# EAGLE board Arduino_MEGA_2560-Rev3 (EAGLE 7.7.0)

Size 100 x 80 mm. Coordinates in mm from the lower left corner, seen from the top.
Outline: 100,0 0,0 0,80 100,80 100,0
Copper layers (1*16): Top 0.035mm / dielectric 1.5mm / Bottom 0.035mm
Design rules "default": minimum track width 8mil, minimum drill 16mil, track to track 7mil, track to pad 7mil, pad to pad 8mil, via to via 10mil, smd to smd 7mil, copper to edge 27mil, drill to drill 12mil, minimum pad ring 10mil, minimum via ring 10mil, stop-mask expansion 2mil, vias tented up to drill 24mil, thermal gap 10mil
Net classes: 0 default: width 0.203 mm, drill 0.406 mm, clearance 0.203 mm; 1 power: width 0.61 mm, drill 0.406 mm, clearance 0.203 mm; 2 gnd: width 0.305 mm, drill 0.406 mm, clearance 0.203 mm; 3 power usb: width 0.508 mm, drill 0.406 mm, clearance 0.203 mm
Holes 3.2 mm at 96.52,2.54 15.24,50.8 90.17,50.8 13.97,2.54 66.04,35.56 66.04,7.62

## Footprints (pad centres in the part's own frame; a part is rotated, then mirrored left to right if it is on the bottom)
C0603-ROUND = smd 0.898 x 1.1: 1 -0.889,0; 2 0.889,0
0603-CAP = smd 1.1 x 1: 1 -0.85,0; 2 0.85,0
1X08 = drill 0.85 pad 1.422 long: 1 -8.89,0; 2 -6.35,0; 3 -3.81,0; 4 -1.27,0; 5 1.27,0; 6 3.81,0; 7 6.35,0; 8 8.89,0
SMB = smd 2.4 x 2.4: A 2.2,0; C -2.2,0
MINIMELF = smd 1.4 x 1.8: A 1.7,0; C -1.7,0
FIDUCIA-MOUNT = smd 1.016 x 1.016: P$1 0,0
SOT223 = smd 1.219 x 2.235: 1 -2.311,-3.099; 2 0,-3.099; 3 2.311,-3.099 | smd 3.6 x 2.2: 4 0,3.099
TQFP100 = smd 1.5 x 0.3: 1 -8,6; 2 -8,5.5; 3 -8,5; 4 -8,4.5; 5 -8,4; 6 -8,3.5; 7 -8,3; 8 -8,2.5; 9 -8,2; 10 -8,1.5; 11 -8,1; 12 -8,0.5; 13 -8,0; 14 -8,-0.5; 15 -8,-1; 16 -8,-1.5; 17 -8,-2; 18 -8,-2.5; 19 -8,-3; 20 -8,-3.5; 21 -8,-4; 22 -8,-4.5; 23 -8,-5; 24 -8,-5.5; 25 -8,-6; 51 8,-6; 52 8,-5.5; 53 8,-5; 54 8,-4.5; 55 8,-4; 56 8,-3.5; 57 8,-3; 58 8,-2.5; 59 8,-2; 60 8,-1.5; 61 8,-1; 62 8,-0.5; 63 8,0; 64 8,0.5; 65 8,1; 66 8,1.5; 67 8,2; 68 8,2.5; 69 8,3; 70 8,3.5; 71 8,4; 72 8,4.5; 73 8,5; 74 8,5.5; 75 8,6 | smd 0.3 x 1.5: 26 -6,-8; 27 -5.5,-8; 28 -5,-8; 29 -4.5,-8; 30 -4,-8; 31 -3.5,-8; 32 -3,-8; 33 -2.5,-8; 34 -2,-8; 35 -1.5,-8; 36 -1,-8; 37 -0.5,-8; 38 0,-8; 39 0.5,-8; 40 1,-8; 41 1.5,-8; 42 2,-8; 43 2.5,-8; 44 3,-8; 45 3.5,-8; 46 4,-8; 47 4.5,-8; 48 5,-8; 49 5.5,-8; 50 6,-8; 76 6,8; 77 5.5,8; 78 5,8; 79 4.5,8; 80 4,8; 81 3.5,8; 82 3,8; 83 2.5,8; 84 2,8; 85 1.5,8; 86 1,8; 87 0.5,8; 88 0,8; 89 -0.5,8; 90 -1,8; 91 -1.5,8; 92 -2,8; 93 -2.5,8; 94 -3,8; 95 -3.5,8; 96 -4,8; 97 -4.5,8; 98 -5,8; 99 -5.5,8; 100 -6,8
MSOP08 = smd 0.3 x 1.2: 1 -0.976,-2.113; 2 -0.326,-2.113; 3 0.324,-2.113; 4 0.974,-2.113; 5 0.974,2.112; 6 0.324,2.112; 7 -0.326,2.112; 8 -0.976,2.112
2X03 = drill 0.95 pad 1.55 octagon: 1 -2.54,-1.27; 2 -2.54,1.27; 3 0,-1.27; 4 0,1.27; 5 2.54,-1.27; 6 2.54,1.27
1X06_LONGPADS = drill 1.118 pad 1.88 long: 1 0,0; 2 2.54,0; 3 5.08,0; 4 7.62,0; 5 10.16,0; 6 12.7,0
1X04_LONGPADS = drill 1.118 pad 1.88 long: 1 0,0; 2 2.54,0; 3 5.08,0; 4 7.62,0
JST-5-PTH-VERT = drill 0.7 pad 1.6: 1 -4,0.18; 2 -2,0.18; 3 0,0.18; 4 2,0.18; 5 4,0.18
USB-B-MICRO-SMD = smd 1.45 x 0.4: D+ 2.725,0; D- 2.725,0.65; GND 2.725,-1.3; ID 2.725,-0.65; VBUS 2.725,1.3 | smd 1.5 x 1.8: SHIELD1 0,3.685; SHIELD2 0,-3.685 | smd 1.5 x 2.5: SHIELD3 0,0 | hole 0.85: 2.2,1.9; 2.2,-1.9
1X10 = drill 0.85 pad 1.422 long: 1 -11.43,0; 2 -8.89,0; 3 -6.35,0; 4 -3.81,0; 5 -1.27,0; 6 1.27,0; 7 3.81,0; 8 6.35,0; 9 8.89,0; 10 11.43,0
CHIP-LED0805 = smd 1.2 x 1.2: A 0,-1.05; C 0,1.05
PANASONIC_D = smd 3 x 1.4: + 2.4,0; - -2.4,0
R0603-ROUND = smd 0.898 x 1.1: 1 -0.889,0; 2 0.889,0
0603-RES = smd 1.1 x 1: 1 -0.85,0; 2 0.85,0
0603 = smd 1.1 x 1: 1 -0.85,0; 2 0.85,0
TS42 = smd 1.6 x 1.4: 1 -4.2,2.25; 2 4.2,2.25; 3 -4.2,-2.25; 4 4.2,-2.25; 5 -4.2,0
CAT16 = smd 0.5 x 0.65: 1 -1.2,-0.675; 2 -0.4,-0.675; 3 0.4,-0.675; 4 1.2,-0.675; 5 1.2,0.675; 6 0.4,0.675; 7 -0.4,0.675; 8 -1.2,0.675
CAY16 = smd 0.5 x 0.65: 1 -1.2,-0.675; 2 -0.4,-0.675; 3 0.4,-0.675; 4 1.2,-0.675; 5 1.2,0.675; 6 0.4,0.675; 7 -0.4,0.675; 8 -1.2,0.675
SSOP28DB = smd 0.348 x 1.397: 1 -4.225,-3.656; 2 -3.575,-3.656; 3 -2.925,-3.656; 4 -2.275,-3.656; 5 -1.625,-3.656; 6 -0.975,-3.656; 7 -0.325,-3.656; 8 0.325,-3.656; 9 0.975,-3.656; 10 1.625,-3.656; 11 2.275,-3.656; 12 2.925,-3.656; 13 3.575,-3.656; 14 4.225,-3.656; 15 4.225,3.656; 16 3.575,3.656; 17 2.925,3.656; 18 2.275,3.656; 19 1.625,3.656; 20 0.975,3.656; 21 0.325,3.656; 22 -0.325,3.656; 23 -0.975,3.656; 24 -1.625,3.656; 25 -2.275,3.656; 26 -2.925,3.656; 27 -3.575,3.656; 28 -4.225,3.656
POWERSUPPLY_DC-21MM = drill 1.4 pad 4.826 octagon: 1 -5.08,-3.353; 2 -0.076,-6.35; 3 -0.076,-0.356 | drill 1.4: 4 -5.08,-4.115; 5 -5.08,-2.591; 6 -0.838,-0.356; 7 0.686,-0.356; 8 -0.838,-6.35; 9 0.686,-6.35
2X18 = drill 0.95 pad 1.676 octagon: 1 -21.59,-1.27; 2 -21.59,1.27; 3 -19.05,-1.27; 4 -19.05,1.27; 5 -16.51,-1.27; 6 -16.51,1.27; 7 -13.97,-1.27; 8 -13.97,1.27; 9 -11.43,-1.27; 10 -11.43,1.27; 11 -8.89,-1.27; 12 -8.89,1.27; 13 -6.35,-1.27; 14 -6.35,1.27; 15 -3.81,-1.27; 16 -3.81,1.27; 17 -1.27,-1.27; 18 -1.27,1.27; 19 1.27,-1.27; 20 1.27,1.27; 21 3.81,-1.27; 22 3.81,1.27; 23 6.35,-1.27; 24 6.35,1.27; 25 8.89,-1.27; 26 8.89,1.27; 27 11.43,-1.27; 28 11.43,1.27; 29 13.97,-1.27; 30 13.97,1.27; 31 16.51,-1.27; 32 16.51,1.27; 33 19.05,-1.27; 34 19.05,1.27; 35 21.59,-1.27; 36 21.59,1.27
RESONATOR = smd 0.7 x 2: 1 -1,0; 2 0,0; 3 1,0

## Placement (x,y rotation side)
C1  22p  [C0603-ROUND]  31.53,21.61 270 top
C2  100n  [C0603-ROUND]  25.35,17.65 270 top
C3  100n  [C0603-ROUND]  35.94,56.45 0 top
C4  100n  [C0603-ROUND]  36.61,12.11 0 top
C5  100n  [C0603-ROUND]  68.93,52.37 0 top
C6  100n  [C0603-ROUND]  39.05,30.42 180 top
C7  10nF  [0603-CAP]  -15.24,-101.6 0 top  (outside the outline)
C8  10nF  [0603-CAP]  -15.24,-106.68 0 top  (outside the outline)
C9  10nF  [0603-CAP]  -15.24,-111.76 0 top  (outside the outline)
C10  10nF  [0603-CAP]  -15.24,-116.84 0 top  (outside the outline)
C11  10nF  [0603-CAP]  -15.24,-177.8 0 top  (outside the outline)
C12  10nF  [0603-CAP]  -15.24,-182.88 0 top  (outside the outline)
C13  10nF  [0603-CAP]  -15.24,-187.96 0 top  (outside the outline)
C14  10nF  [0603-CAP]  -15.24,-193.04 0 top  (outside the outline)
COMMUNICATION  8x1F-H8.5  [1X08]  75.47,75.8 180 top
D1  M7  [SMB]  5.79,12.41 90 top
D3  CD1206-S01575  [MINIMELF]  34.56,21.61 90 top
FD1  FIDUCIALMOUNT  [FIDUCIA-MOUNT]  96.84,77.19 0 top
FD2  FIDUCIALMOUNT  [FIDUCIA-MOUNT]  2.67,2.41 0 top
FD3  FIDUCIALMOUNT  [FIDUCIA-MOUNT]  2.78,77.1 0 top
FD4  FIDUCIALMOUNT  [FIDUCIA-MOUNT]  96.8,7.35 0 top
IC1  NCP1117ST50T3G  [SOT223]  13.64,12.78 90 top
IC3  ATMEGA2560-16AU  [TQFP100]  60.8,36.35 0 top
IC7  LMV358IDGKR  [MSOP08]  24.41,24.34 90 top
ICSP  3x2M  [2X03]  65.9,19.94 270 top
J1  [1X06_LONGPADS]  2.76,57.31 90 top
J2  [1X04_LONGPADS]  20.54,59.85 90 top
J3  [JST-5-PTH-VERT]  30.48,76.2 0 top
J4  [JST-5-PTH-VERT]  -5.08,-127 0 top  (outside the outline)
J5  [USB-B-MICRO-SMD]  -40.64,-205.74 0 top  (outside the outline)
JP6  10x1F-H8.5  [1X10]  76.83,5.8 0 top
L  YELLOW  [CHIP-LED0805]  35.94,54.16 90 top
ON  GREEN  [CHIP-LED0805]  69.2,48.83 90 top
ON1  GREEN  [CHIP-LED0805]  -22.86,-203.2 0 top  (outside the outline)
ON2  GREEN  [CHIP-LED0805]  -30.48,-203.2 0 top  (outside the outline)
PC1  47u  [PANASONIC_D]  24.41,12.14 90 top
PC2  47u  [PANASONIC_D]  31.53,12.14 90 top
POWER  8x1F-H8.5  [1X08]  29.17,2.46 180 top
PWML  8x1F-H8.5  [1X08]  52.61,5.8 180 top
R1  1M  [R0603-ROUND]  39.51,19.61 90 top
R2  30.1k  [0603-RES]  -15.24,-40.64 0 top  (outside the outline)
R3  30.1k  [0603-RES]  -15.24,-45.72 0 top  (outside the outline)
R4  30.1k  [0603-RES]  -15.24,-50.8 0 top  (outside the outline)
R5  30.1k  [0603-RES]  -15.24,-55.88 0 top  (outside the outline)
R6  30.1k  [0603-RES]  -15.24,-137.16 0 top  (outside the outline)
R7  30.1k  [0603-RES]  -15.24,-142.24 0 top  (outside the outline)
R8  30.1k  [0603-RES]  -15.24,-147.32 0 top  (outside the outline)
R9  30.1k  [0603-RES]  -15.24,-152.4 0 top  (outside the outline)
R10  10K  [0603-RES]  -15.24,-81.28 0 top  (outside the outline)
R11  10K  [0603-RES]  -15.24,-86.36 0 top  (outside the outline)
R12  10K  [0603-RES]  -15.24,-91.44 0 top  (outside the outline)
R13  10K  [0603-RES]  -15.24,-96.52 0 top  (outside the outline)
R14  10K  [0603-RES]  -15.24,-157.48 0 top  (outside the outline)
R15  10K  [0603-RES]  -15.24,-162.56 0 top  (outside the outline)
R16  10K  [0603-RES]  -15.24,-167.64 0 top  (outside the outline)
R17  10K  [0603-RES]  -15.24,-172.72 0 top  (outside the outline)
R18  330  [0603]  -30.48,-208.28 0 top  (outside the outline)
R19  330  [0603]  -30.48,-213.36 0 top  (outside the outline)
RESET  TS42031-160R-TR-7260  [TS42]  73.17,21.94 90 top
RN1  10K  [CAT16]  83.64,67.83 270 top
RN3  1k  [CAY16]  36.94,50.37 270 top
RN5  10K  [CAT16]  19.41,24.51 90 top
U1  FT232RL  [SSOP28DB]  -12.7,-200.66 0 top  (outside the outline)
X1  POWERSUPPLY_DC21MMX  [POWERSUPPLY_DC-21MM]  6.33,26.38 90 top
XIO  18x2F-H8.5  [2X18]  86.25,40.21 270 top
Y1  CSTCE16M0V53-R0 16MHZ  [RESONATOR]  37.35,21.61 270 top

## Library data of the parts
C1-C6 COMMUNICATION FD1-FD4 IC3 ICSP JP6 POWER PWML R1 RESET X1 XIO Y1 = SmartPrj
C7-C14 = SparkFun-Capacitors; PROD_ID: CAP-00867
D1 D3 = diode
IC1 IC7 = linear
J1 J3 J4 = SparkFun-Connectors
J2 = SparkFun-Connectors; PROD_ID: CONN-09696
J5 = SparkFun-Connectors; PROD_ID: CONN-11752
L ON ON1 ON2 = led
PC1 PC2 = rcl
R2-R9 = SparkFun-Resistors; PROD_ID: RES-08595
R10-R17 = SparkFun-Resistors; PROD_ID: RES-00824
R18 R19 = SparkFun-Resistors; PROD_ID: RES-00818
RN1 RN3 RN5 = resistor-dil
U1 = SparkFun-IC-Comms; PROD_ID: IC-00870

## Nets
3VOLTS: J1.5
5-GND: RESET.5
((PS0)): J2.4
((PS1)): J2.3
+3V3 [power]: POWER.4
+5V [power usb]: C4.1 C5.1 C6.1 D3.C IC1.2 IC1.4 IC3.10 IC3.31 IC3.61 IC3.80 IC3.100 ICSP.2 PC2.+ POWER.2 POWER.5 RN1.6 RN1.7 RN3.1 RN5.8 XIO.1 XIO.2
ADC0: C7.1 IC3.97 R2.2 R10.2
ADC1: C8.1 IC3.96 R3.2 R11.2
ADC2: C9.1 IC3.95 R4.2 R12.2
ADC3: C10.1 IC3.94 R5.2 R13.2
ADC4: C11.1 IC3.93 R6.2 R14.2
ADC5: C12.1 IC3.92 R7.2 R15.2
ADC6: C13.1 IC3.91 R8.2 R16.2
ADC7: C14.1 IC3.90 R9.2 R17.2
ADC8: IC3.89
ADC9: IC3.88
ADC10: IC3.87
ADC11: IC3.86
ADC12: IC3.85
ADC13: IC3.84
ADC14: IC3.83
ADC15: IC3.82
ADR: J2.1
AREF: C3.1 IC3.98 JP6.3
GND [gnd]: C1.2 C2.2 C3.2 C4.2 C5.2 C6.2 C7.2 C8.2 C9.2 C10.2 C11.2 C12.2 C13.2 C14.2 IC1.1 IC3.11 IC3.32 IC3.62 IC3.81 IC3.99 ICSP.6 J1.4 J3.5 J4.5 JP6.4 L.C ON.C PC1.- PC2.- POWER.6 POWER.7 R10.1 R11.1 R12.1 R13.1 R14.1 R15.1 R16.1 R17.1 RESET.1 RESET.2 U1.7 U1.18 U1.21 U1.25 U1.26 X1.1 X1.3 XIO.35 XIO.36 Y1.2
INT: J2.2
INV: J1.6
L13: IC7.1 IC7.2 RN3.7
N$1: J3.1 R2.1
N$2: L.A RN3.2
N$3: ON.A RN3.8
N$4: ON1.A R19.1
N$5: J4.1 R6.1
N$6: J3.2 R3.1
N$7: U1.5
N$8: J3.3 R4.1
N$9: ON2.A R18.1
N$10: J3.4 R5.1
N$11: R19.2
N$12: J4.2 R7.1
N$13: J4.3 R8.1
N$14: J4.4 R9.1
N$15: ON1.C U1.23
N$16: ON2.C U1.22
N$17: R18.2
N$18: J5.VBUS
N$19: U1.4 U1.20
N$20: J5.GND
PA0: IC3.78 XIO.3
PA1: IC3.77 XIO.4
PA2: IC3.76 XIO.5
PA3: IC3.75 XIO.6
PA4: IC3.74 XIO.7
PA5: IC3.73 XIO.8
PA6: IC3.72 XIO.9
PA7: IC3.71 XIO.10
PB0: IC3.19 XIO.34
PB1: IC3.20 ICSP.3 XIO.33
PB2: IC3.21 ICSP.4 XIO.32
PB3: IC3.22 ICSP.1 XIO.31
PB4: IC3.23 JP6.8
PB5: IC3.24 JP6.7
PB6: IC3.25 JP6.6
PB7: IC3.26 IC7.3 JP6.5
PC0: IC3.53 XIO.18
PC1: IC3.54 XIO.17
PC2: IC3.55 XIO.16
PC3: IC3.56 XIO.15
PC4: IC3.57 XIO.14
PC5: IC3.58 XIO.13
PC6: IC3.59 XIO.12
PC7: IC3.60 XIO.11
PD7: IC3.50 XIO.19
PE0: IC3.2 PWML.1
PE1: IC3.3 PWML.2
PE3: IC3.5 PWML.6
PE4: IC3.6 PWML.3
PE5: IC3.7 PWML.4
PG0: IC3.51 XIO.22
PG1: IC3.52 XIO.21
PG2: IC3.70 XIO.20
PG5: IC3.1 PWML.5
PH3: IC3.15 PWML.7
PH4: IC3.16 PWML.8
PH5: IC3.17 JP6.10
PH6: IC3.18 JP6.9
PL0: IC3.35 XIO.30
PL1: IC3.36 XIO.29
PL2: IC3.37 XIO.28
PL3: IC3.38 XIO.27
PL4: IC3.39 XIO.26
PL5: IC3.40 XIO.25
PL6: IC3.41 XIO.24
PL7: IC3.42 XIO.23
PWRIN [power]: D1.A X1.2
RESET: C1.1 D3.A IC3.30 ICSP.5 J1.1 POWER.3 RESET.3 RESET.4 RN5.1
RXD: U1.1
RXD1: COMMUNICATION.3 IC3.45
RXD2: COMMUNICATION.5 IC3.12
RXD3: COMMUNICATION.7 IC3.63
SCL: COMMUNICATION.1 IC3.43 J1.2 JP6.1 RN1.2
SDA: COMMUNICATION.2 IC3.44 J1.3 JP6.2 RN1.3
TXD1: COMMUNICATION.4 IC3.46
TXD2: COMMUNICATION.6 IC3.13
TXD3: COMMUNICATION.8 IC3.64
V+: IC7.8
V-: IC7.4
VIN [power]: C2.1 D1.C IC1.3 PC1.+ POWER.8
XTAL1: IC3.34 R1.1 Y1.3
XTAL2: IC3.33 R1.2 Y1.1

## Tracks (layer width: path | path; a pad name or v marks a point on that pad's centre or on a via)
+5V  (20 unrouted)
ADC0  (3 unrouted)
ADC1  (3 unrouted)
ADC2  (3 unrouted)
ADC3  (3 unrouted)
ADC4  (3 unrouted)
ADC5  (3 unrouted)
ADC6  (3 unrouted)
ADC7  (3 unrouted)
AREF  (2 unrouted)
GND  (50 unrouted)
L13  (2 unrouted)
N$1  (1 unrouted)
N$2  (1 unrouted)
N$3  (1 unrouted)
N$4  (1 unrouted)
N$5  (1 unrouted)
N$6  (1 unrouted)
N$8  (1 unrouted)
N$9  (1 unrouted)
N$10  (1 unrouted)
N$12  (1 unrouted)
N$13  (1 unrouted)
N$14  (1 unrouted)
N$15  (1 unrouted)
N$16  (1 unrouted)
N$19  (1 unrouted)
PA0  (1 unrouted)
PA1  (1 unrouted)
PA2  (1 unrouted)
PA3  (1 unrouted)
PA4  (1 unrouted)
PA5  (1 unrouted)
PA6  (1 unrouted)
PA7  (1 unrouted)
PB0  (1 unrouted)
PB1  (2 unrouted)
PB2  (2 unrouted)
PB3  (2 unrouted)
PB4  (1 unrouted)
PB5  (1 unrouted)
PB6  (1 unrouted)
PB7  (2 unrouted)
PC0  (1 unrouted)
PC1  (1 unrouted)
PC2  (1 unrouted)
PC3  (1 unrouted)
PC4  (1 unrouted)
PC5  (1 unrouted)
PC6  (1 unrouted)
PC7  (1 unrouted)
PD7  (1 unrouted)
PE0  (1 unrouted)
PE1  (1 unrouted)
PE3  (1 unrouted)
PE4  (1 unrouted)
PE5  (1 unrouted)
PG0  (1 unrouted)
PG1  (1 unrouted)
PG2  (1 unrouted)
PG5  (1 unrouted)
PH3  (1 unrouted)
PH4  (1 unrouted)
PH5  (1 unrouted)
PH6  (1 unrouted)
PL0  (1 unrouted)
PL1  (1 unrouted)
PL2  (1 unrouted)
PL3  (1 unrouted)
PL4  (1 unrouted)
PL5  (1 unrouted)
PL6  (1 unrouted)
PL7  (1 unrouted)
PWRIN  (1 unrouted)
RESET  (8 unrouted)
RXD1  (1 unrouted)
RXD2  (1 unrouted)
RXD3  (1 unrouted)
SCL  (4 unrouted)
SDA  (4 unrouted)
TXD1  (1 unrouted)
TXD2  (1 unrouted)
TXD3  (1 unrouted)
VIN  (4 unrouted)
XTAL1  (2 unrouted)
XTAL2  (2 unrouted)

## Text on the board
Top: MEGAXL-Rev3b
tPlace: 9 | 8 | 7 | 6 | 5 | 4 | 3 | 2 | 1 | 0 | 22 | 14 | 15 | 16 | 17 | 18 | 19 | 20 | 21 | 13 | 12 | 11 | 10 | 24 | 26 | 28 | 30 | 31 | 32 | 33 | 34 | 35 | 36 | 37 | 38 | 39 | 40 | 41 | 42 | 43 | www.arduino.cc | 44 | 45 | 46 | 47 | TM | 48 | 49 | 50 | 51 | 52 | 53 | 0 | 1 | 2 | 3 | 4 | 5 | 6 | 7 | 8 | 9 | 10 | 11 | 12 | 13 | 14 | 15
tNames: SCL | SDA | M.Banzi | 5V | D.Cuartielles | T.Igoe | MADE IN | G.Martino | ITALY | D.Mellis | GND | AREF | PWM | TX | RX | TX3 | RX3 | TX2 | RX2 | TX1 | RX1 | SDA | SCL | 1 | DIGITAL | Arduino | MEGA 2560 | ANALOG IN | GND | IOREF | RESET | 3V3 | 5V | GND | VIN
bNames: MADE IN | designed by | ITALY | tinker it
ReferenceLC: ON | TX | RX | PC1 | PC2
ReferenceLS: Tether | OUT | Accelerometer | USB | Video | Regulator | IN | Barrel Jack | ESC Signals